# EAGLE board ENGI301_sun_clock (EAGLE 9.5.1)
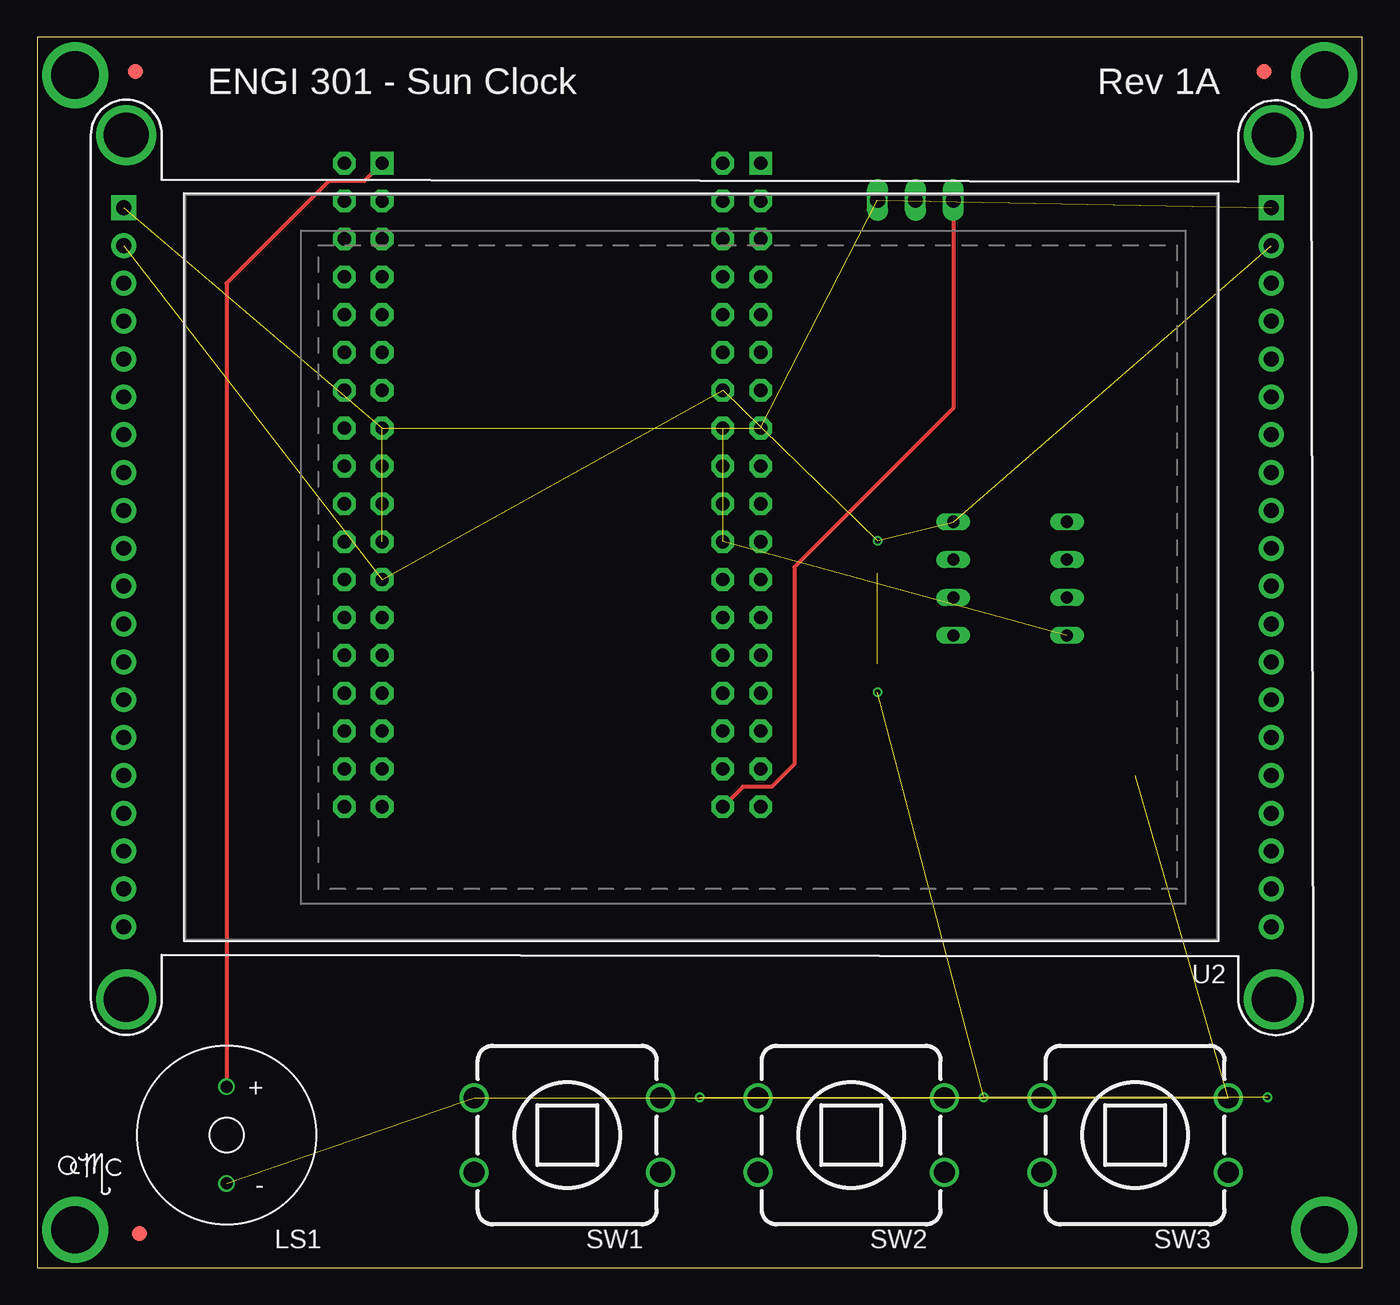
[diagram p0: board, top side]
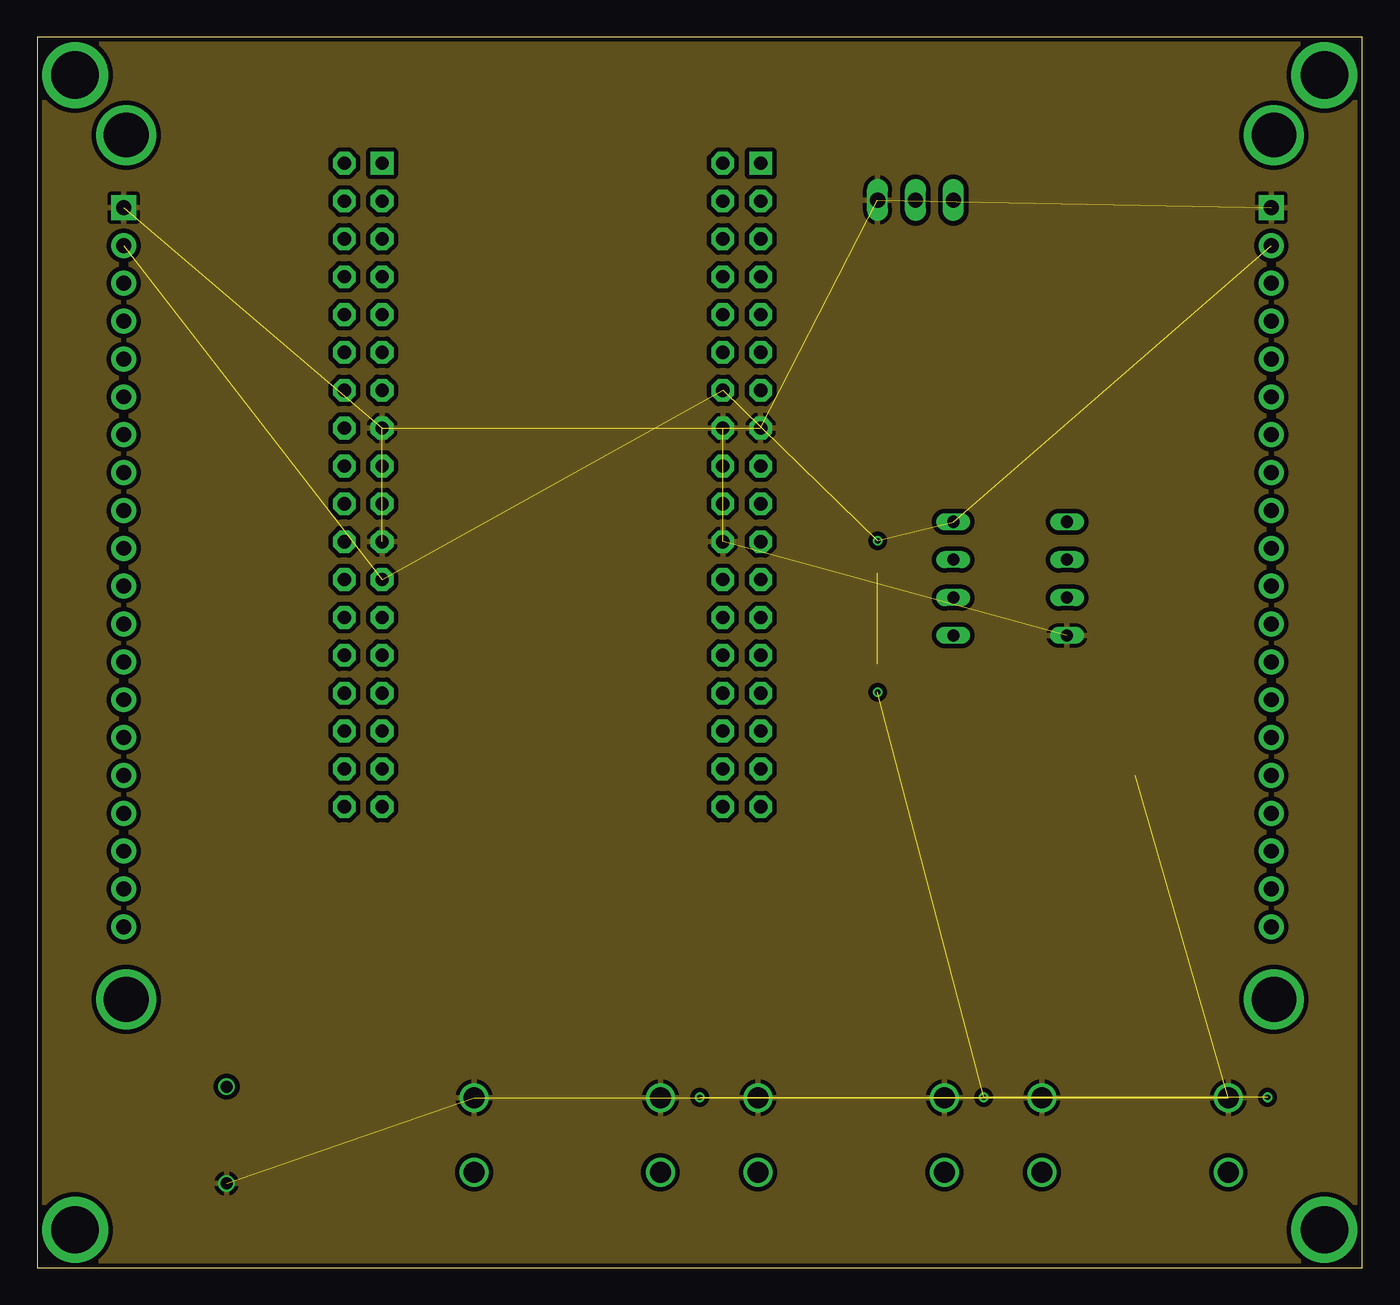
[diagram p1: board, inner layer Route2]
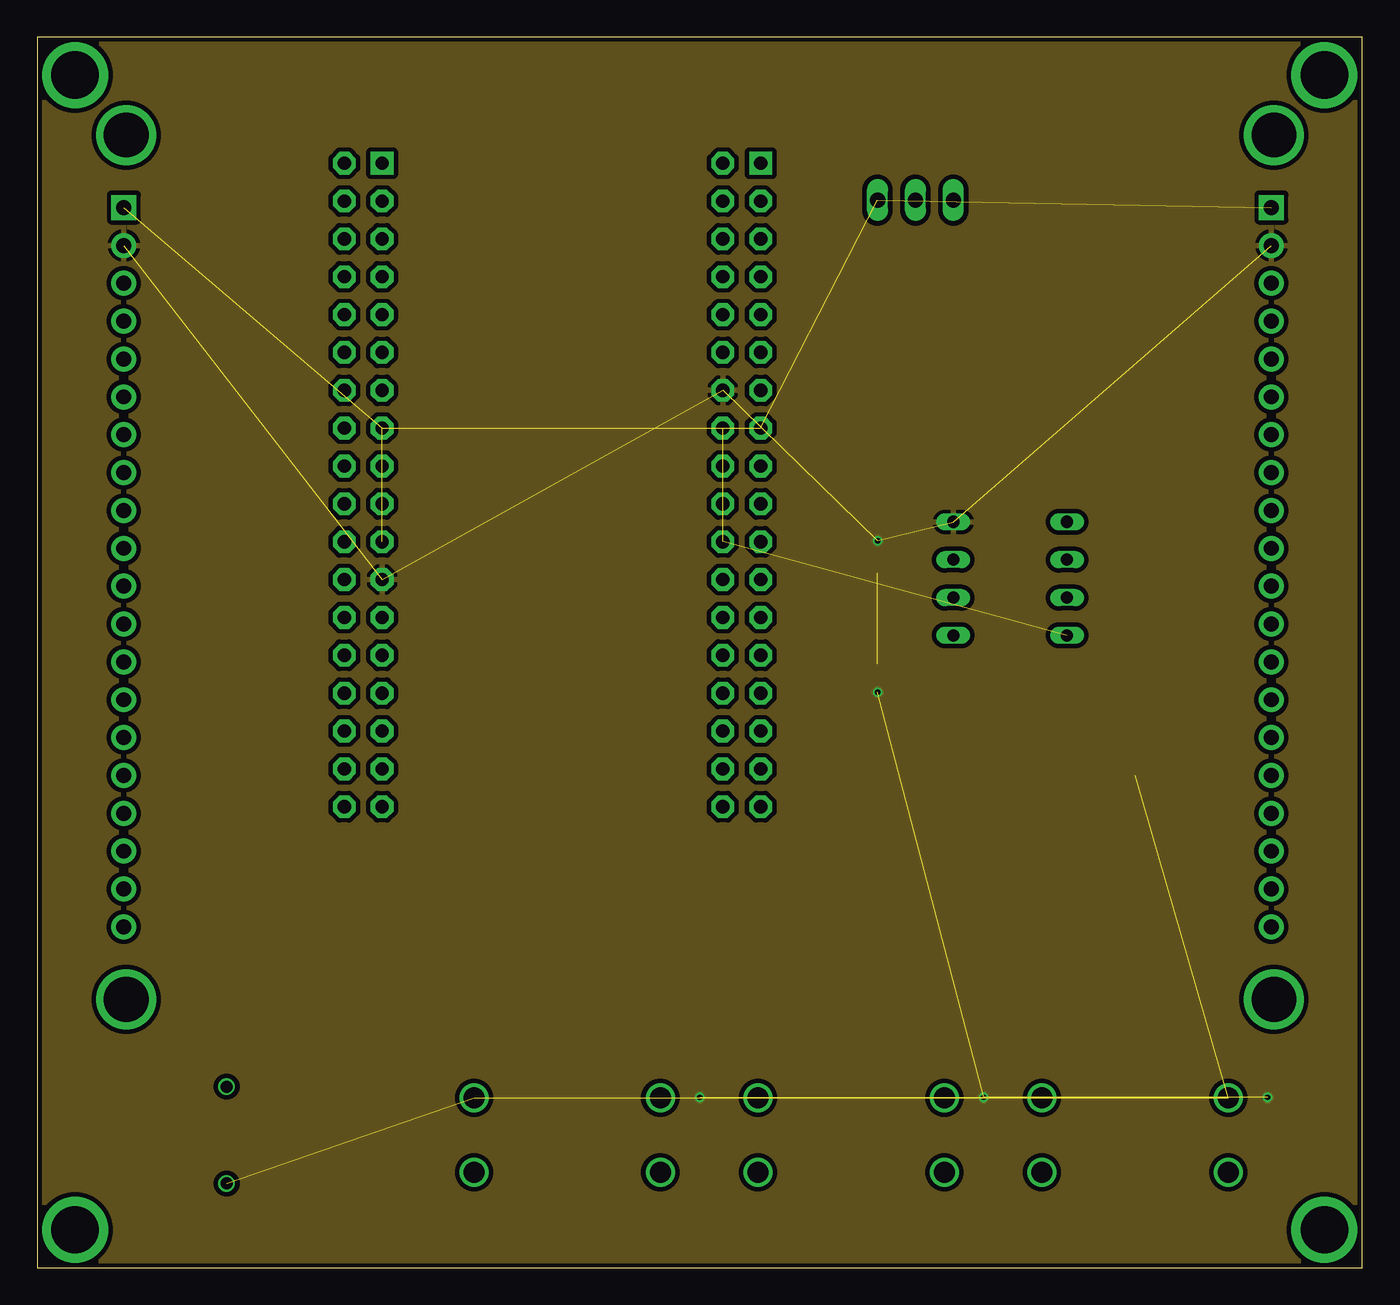
[diagram p2: board, inner layer Route15]
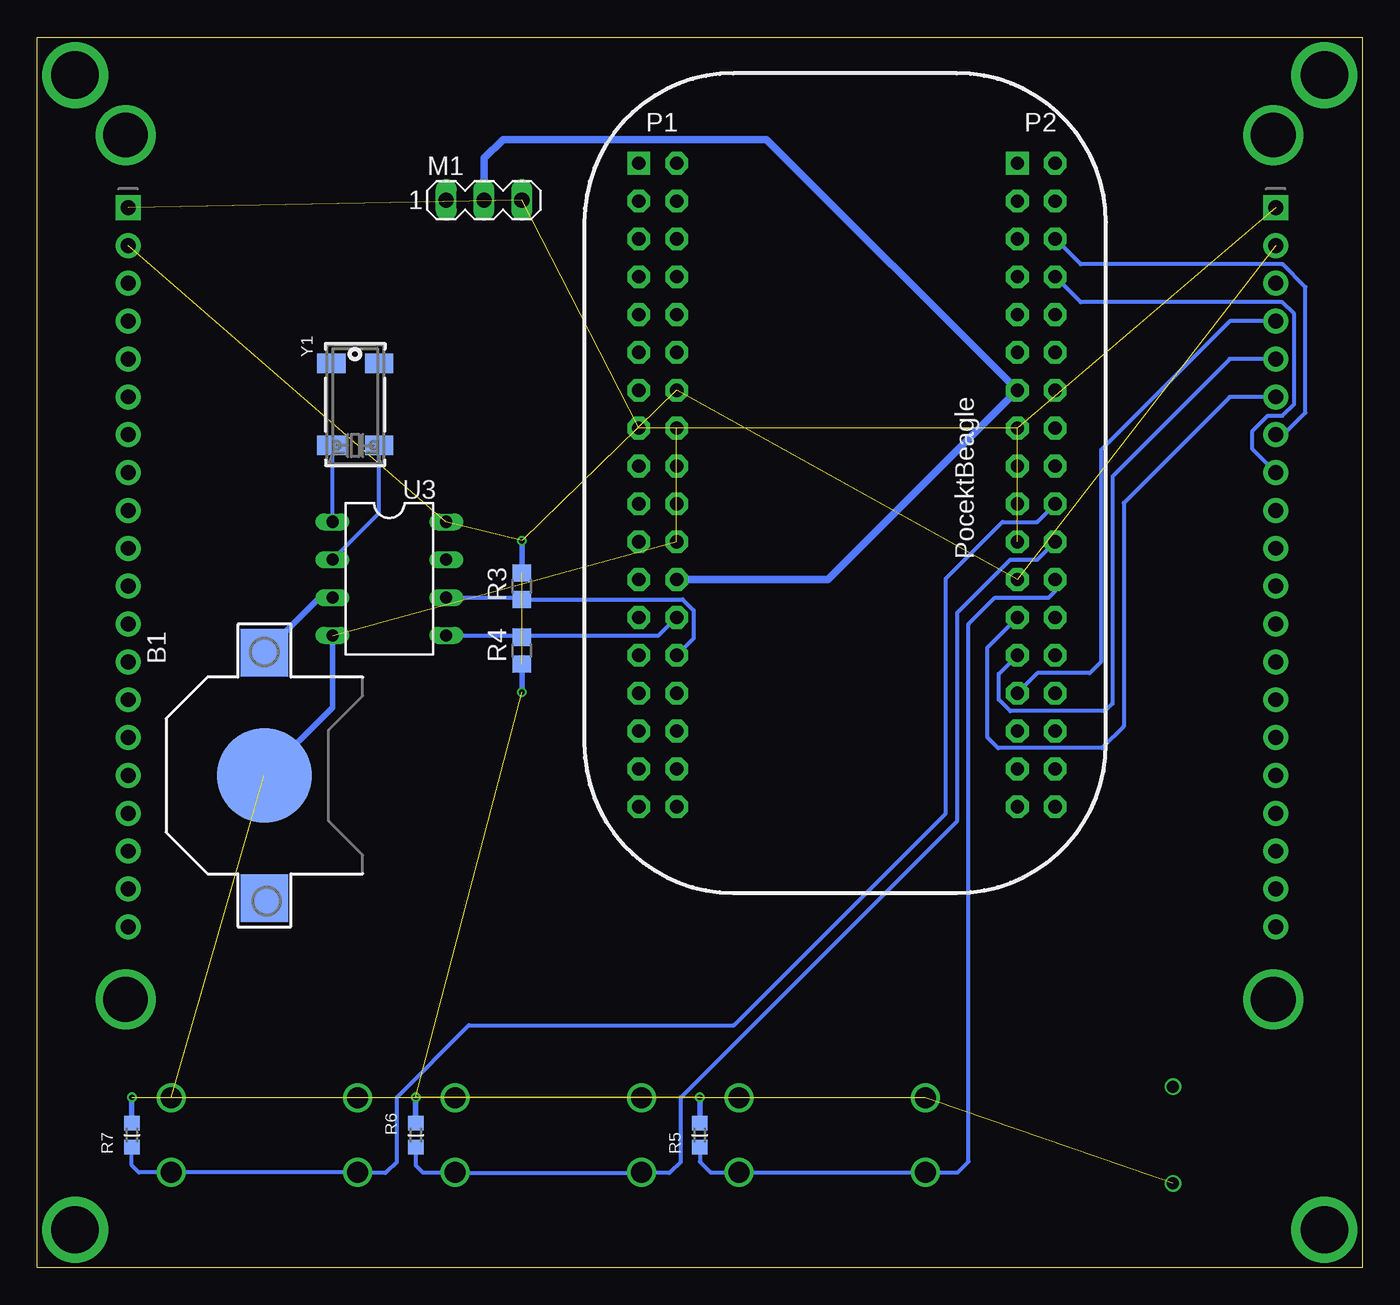
[diagram p3: board, bottom side, seen from below]

Size 88.9 x 82.55 mm. Coordinates in mm from the lower left corner, seen from the top.
Outline: 0,0 88.9,0 88.9,82.55 0,82.55 0,0
Copper layers (1*2*15*16): Top 0.035mm / dielectric 0.23mm / Route2 0.035mm / dielectric 0.93mm / Route15 0.035mm / dielectric 0.23mm / Bottom 0.035mm
Design rules "ENGI301_4lyr": minimum track width 10mil, minimum drill 12mil, track to track 10mil, track to pad 10mil, pad to pad 10mil, via to via 10mil, smd to smd 10mil, copper to edge 10mil, drill to drill 12mil, minimum pad ring 6mil, minimum via ring 6mil, stop-mask expansion 3mil, vias tented up to drill 25mil, thermal gap 10mil
Holes 0.35 mm at -21.59,74.93

## Footprints (pad centres in the part's own frame; a part is rotated, then mirrored left to right if it is on the bottom)
CR1220 = smd 3.2 x 3.2: +$1 -8.225,0; +$2 8.225,0 | smd 6.35 x 6.35: - 0,0
FIDUCIAL_40MIL = smd 1.016 x 1.016: P$1 0,0
BUZZER_6.5MM = drill 0.8: + 0,-3.25; - 0,3.25
MA03-1 = drill 1.016 long: 1 -2.54,0; 2 0,0; 3 2.54,0
MOUNTING_HOLE = drill 3.175 pad 4.445: P$1 0,0
R0805 = smd 1.143 x 1.27: 1 -0.889,0; 2 0.889,0
R0603 = smd 0.95 x 1.031: 1 -0.8,0; 2 0.8,0
BUTTON_12.5MM = drill 1.4: 1 -6.25,2.5; 2 -6.25,-2.5; 3 6.25,2.5; 4 6.25,-2.5
POCKETBEAGLE = drill 0.889 pad 1.524 square: 1 5.91,3.53; 37 5.91,28.93 | drill 0.889 pad 1.524 octagon: 2 5.91,6.07; 3 8.45,3.53; 4 8.45,6.07; 5 10.99,3.53; 6 10.99,6.07; 7 13.53,3.53; 8 13.53,6.07; 9 16.07,3.53; 10 16.07,6.07; 11 18.61,3.53; 12 18.61,6.07; 13 21.15,3.53; 14 21.15,6.07; 15 23.69,3.53; 16 23.69,6.07; 17 26.23,3.53; 18 26.23,6.07; 19 28.77,3.53; 20 28.77,6.07; 21 31.31,3.53; 22 31.31,6.07; 23 33.85,3.53; 24 33.85,6.07; 25 36.39,3.53; 26 36.39,6.07; 27 38.93,3.53; 28 38.93,6.07; 29 41.47,3.53; 30 41.47,6.07; 31 44.01,3.53; 32 44.01,6.07; 33 46.55,3.53; 34 46.55,6.07; 35 49.09,3.53; 36 49.09,6.07; 38 5.91,31.47; 39 8.45,28.93; 40 8.45,31.47; 41 10.99,28.93; 42 10.99,31.47; 43 13.53,28.93; 44 13.53,31.47; 45 16.07,28.93; 46 16.07,31.47; 47 18.61,28.93; 48 18.61,31.47; 49 21.15,28.93; 50 21.15,31.47; 51 23.69,28.93; 52 23.69,31.47; 53 26.23,28.93; 54 26.23,31.47; 55 28.77,28.93; 56 28.77,31.47; 57 31.31,28.93; 58 31.31,31.47; 59 33.85,28.93; 60 33.85,31.47; 61 36.39,28.93; 62 36.39,31.47; 63 38.93,28.93; 64 38.93,31.47; 65 41.47,28.93; 66 41.47,31.47; 67 44.01,28.93; 68 44.01,31.47; 69 46.55,28.93; 70 46.55,31.47; 71 49.09,28.93; 72 49.09,31.47
DISP_LCD_2.8IN = drill 1 pad 1.676 square: 1 -24.13,36.83; 21 -24.13,-40.17 | drill 1 pad 1.676: 2 -21.59,36.83; 3 -19.05,36.83; 4 -16.51,36.83; 5 -13.97,36.83; 6 -11.43,36.83; 7 -8.89,36.83; 8 -6.35,36.83; 9 -3.81,36.83; 10 -1.27,36.83; 11 1.27,36.83; 12 3.81,36.83; 13 6.35,36.83; 14 8.89,36.83; 15 11.43,36.83; 16 13.97,36.83; 17 16.51,36.83; 18 19.05,36.83; 19 21.59,36.83; 20 24.13,36.83; 22 -21.59,-40.17; 23 -19.05,-40.17; 24 -16.51,-40.17; 25 -13.97,-40.17; 26 -11.43,-40.17; 27 -8.89,-40.17; 28 -6.35,-40.17; 29 -3.81,-40.17; 30 -1.27,-40.17; 31 1.27,-40.17; 32 3.81,-40.17; 33 6.35,-40.17; 34 8.89,-40.17; 35 11.43,-40.17; 36 13.97,-40.17; 37 16.51,-40.17; 38 19.05,-40.17; 39 21.59,-40.17; 40 24.13,-40.17 | drill 3 pad 3.6: P$1 -29,37; P$2 29,37; P$3 -29,-40; P$4 29,-40
DIL08 = drill 0.813 long: 1 -3.81,-3.81; 2 -1.27,-3.81; 3 1.27,-3.81; 4 3.81,-3.81; 5 3.81,3.81; 6 1.27,3.81; 7 -1.27,3.81; 8 -3.81,3.81
CRYSTAL_8X3.8 = smd 1.3 x 1.9: P$1 -2.75,-1.6; P$2 2.75,-1.6; P$3 2.75,1.6; P$4 -2.75,1.6

## Placement (x,y rotation side)
B1  [CR1220]  73.66,33.02 270 bottom
FUD1  FIDUCIAL  [FIDUCIAL_40MIL]  6.6,80.26 0 top
FUD2  FIDUCIAL  [FIDUCIAL_40MIL]  82.3,80.26 0 top
FUD3  FIDUCIAL  [FIDUCIAL_40MIL]  6.86,2.29 0 top
LS1  BUZZER  [BUZZER_6.5MM]  12.7,8.89 180 top
M1  [MA03-1]  58.93,71.63 0 bottom
MGT1  MOUNTING_HOLE  [MOUNTING_HOLE]  2.54,80.01 0 top
MGT2  MOUNTING_HOLE  [MOUNTING_HOLE]  86.36,80.01 0 top
MGT3  MOUNTING_HOLE  [MOUNTING_HOLE]  2.54,2.54 0 top
MGT4  MOUNTING_HOLE  [MOUNTING_HOLE]  86.36,2.54 0 top
R3  2.2k  [R0805]  56.39,45.72 270 bottom
R4  2.2k  [R0805]  56.39,41.4 90 bottom
R5  2.2k  [R0603]  44.45,8.89 90 bottom
R6  2.2k  [R0603]  63.5,8.89 90 bottom
R7  2.2k  [R0603]  82.55,8.89 90 bottom
SW1  PUSH_BUTTON  [BUTTON_12.5MM]  35.56,8.89 180 top
SW2  PUSH_BUTTON  [BUTTON_12.5MM]  54.61,8.89 180 top
SW3  PUSH_BUTTON  [BUTTON_12.5MM]  73.66,8.89 180 top
U1  POCKETBEAGLE  [POCKETBEAGLE]  52.07,80.01 270 bottom
U2  [DISP_LCD_2.8IN]  45.97,46.99 270 top
U3  DS1307  [DIL08]  65.28,46.23 270 bottom
Y1  [CRYSTAL_8X3.8]  67.56,57.91 90 bottom

## Library data of the parts
B1 FUD1-FUD3 LS1 MGT1-MGT4 R3-R7 SW1-SW3 U1-U3 Y1 = ENGI_301_sun_clock
M1 = ENGI_301_sun_clock; OC_FARNELL: unknown; OC_NEWARK: unknown

## Nets
BAT.VIN: U1.50
BUTTON_1: R5.1 SW1.1 SW1.3 U1.60
BUTTON_2: R6.1 SW2.1 SW2.3 U1.58
BUTTON_3: R7.1 SW3.1 SW3.3 U1.56
BUZZER: LS1.+ U1.37
GND: B1.- LS1.- M1.3 SW1.2 SW1.4 SW2.2 SW2.4 SW3.2 SW3.4 U1.15 U1.16 U1.22 U1.51 U1.57 U2.1 U2.21 U3.4
I2C_SCL: R3.2 U1.28 U3.6
I2C_SDA: R4.2 U1.26 U3.5
SERVO: M1.1 U1.36
SPI_CLK: U1.65 U2.24
SPI_CS: U1.42 U2.27
SPI_D/C: U1.44 U2.28
SPI_MISO: U1.63 U2.25
SPI_MOSI: U1.61 U2.26
SPI_RST: U1.46
SPI_SPI_RST: U2.29
VBAT: B1.+$1 U3.3
VDD_3P3V: R3.1 R4.1 R5.2 R6.2 R7.2 U1.14 U1.59 U2.2 U2.22 U3.8
VDD_5V: M1.2 U1.24 U1.49
VIN: U1.1
X1: U3.1 Y1.P$4
X2: U3.2 Y1.P$1

## Tracks (layer width: path | path; a pad name or v marks a point on that pad's centre or on a via)
BUTTON_1
  Bottom 0.254: U1.60 20.6,45.4 21.04,44.96 24.64,44.96 26.42,43.18 26.42,7.11 27.14,6.39 29.21,6.39 SW1.3 SW1.1 43.73,6.39 44.45,7.11 R5.1
BUTTON_2
  Bottom 0.254: R6.1 63.5,6.86 63.03,6.39 SW2.1 60.82,6.35 48.32,6.35 | U1.58 21.8,47.5 23.62,47.5 27.18,43.94 27.18,29.97 45.72,11.43 45.72,7.11 46.48,6.35 48.32,6.35 | 48.32,6.35 SW2.3
BUTTON_3
  Bottom 0.254: R7.1 82.55,6.86 82.08,6.39 SW3.1 SW3.3 67.37,6.35 65.53,6.35 64.77,7.11 64.77,11.43 59.94,16.26 42.16,16.26 27.94,30.48 27.94,46.23 24.13,50.04 21.8,50.04 U1.56
BUZZER
  Top 0.254: U1.37 21.94,72.9 19.56,72.9 12.7,66.04 LS1.+
GND  (15 unrouted)
  Bottom 0.381: B1.- 69.09,37.59 U3.4
  pour Route2 (isolate 0.305): -1.27,83.82 90.17,83.82 90.17,-1.27 -1.27,-1.27
I2C_SCL
  Bottom 0.254: U3.6 56.52,44.96 R3.2 45.59,44.83 44.86,44.09 44.86,42.22 U1.28
I2C_SDA
  Bottom 0.254: U3.5 56.52,42.42 R4.2 56.26,42.42 47.2,42.42 U1.26
SERVO
  Top 0.254: M1.1 61.47,57.66 50.8,46.99 50.8,33.78 49.28,32.26 47.34,32.26 U1.36
SPI_CLK
  Bottom 0.254: U2.24 8.89,63.5 17.53,54.86 17.53,40.64 18.29,39.88 21.8,39.88 U1.65
SPI_CS
  Bottom 0.254: U2.27 5.3,55.88 3.81,57.37 3.81,65.79 5.33,67.31 18.89,67.31 U1.42
SPI_D/C
  Bottom 0.254: U2.28 7.37,54.9 7.37,56.13 6.35,57.15 5.35,57.15 4.57,57.93 4.57,63.99 5.35,64.77 18.89,64.77 U1.44
SPI_MISO
  Bottom 0.254: U2.25 8.89,60.96 16.76,53.09 16.76,37.85 17.27,37.34 23.62,37.34 24.38,38.1 24.38,39.84 U1.63
SPI_MOSI
  Bottom 0.254: U2.26 8.89,58.42 16,51.31 16,36.32 17.47,34.86 24.44,34.86 25.15,35.56 25.15,41.61 U1.61
VBAT
  Bottom 0.381: U3.3 69.95,44.96 B1.+$1
VDD_3P3V  (via drill 0.35 pad 0.61)  (9 unrouted)
  Bottom 0.381: R5.2 v44.45,11.43 | R6.2 v63.5,11.43 | R7.2 v82.55,11.43 | R4.1 v56.39,38.61 | v56.39,48.77 R3.1
  pour Route15 (isolate 0.305): -2.54,83.82 -2.54,-2.54 91.44,-2.54 91.44,85.09 -2.54,85.09
VDD_5V
  Bottom 0.508: M1.2 58.93,74.42 57.66,75.69 39.97,75.69 U1.49 35.84,46.16 U1.24
X1
  Bottom 0.254: U3.1 69.09,55.09 Y1.P$4
X2
  Bottom 0.254: U3.2 65.96,50.62 Y1.P$1

## Text on the board
tPlace: ENGI 301 - Sun Clock | Rev 1A
tNames: U2
bDocu: SERVO | CRYSTAL | RTC | BATTERY